# EAGLE board Linovo_EU_2Gang_1way (EAGLE 7.4.0)
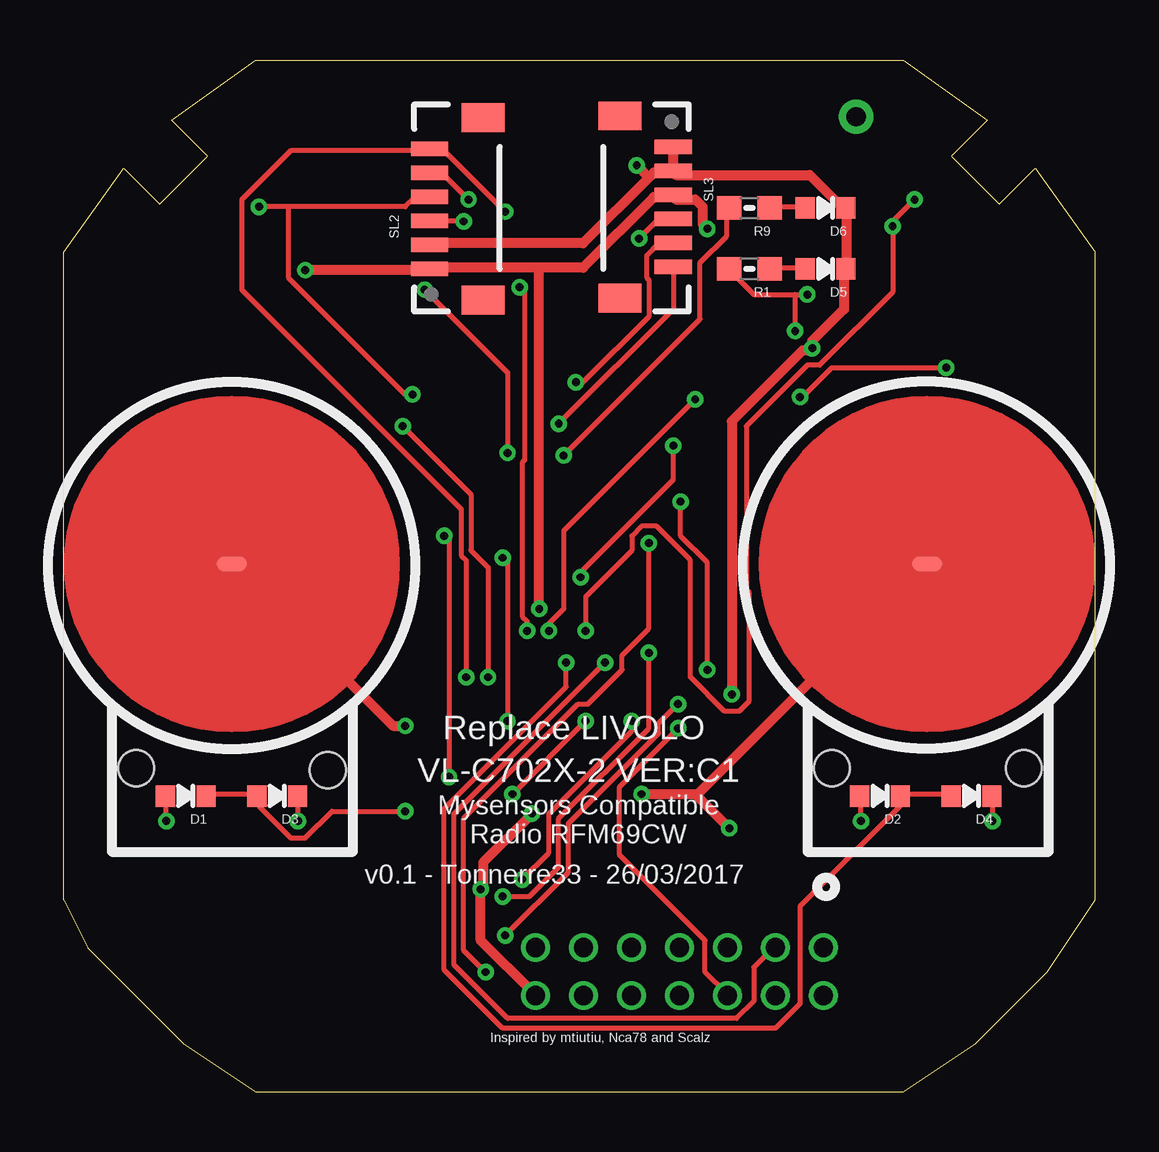
[diagram p0: board, top side]
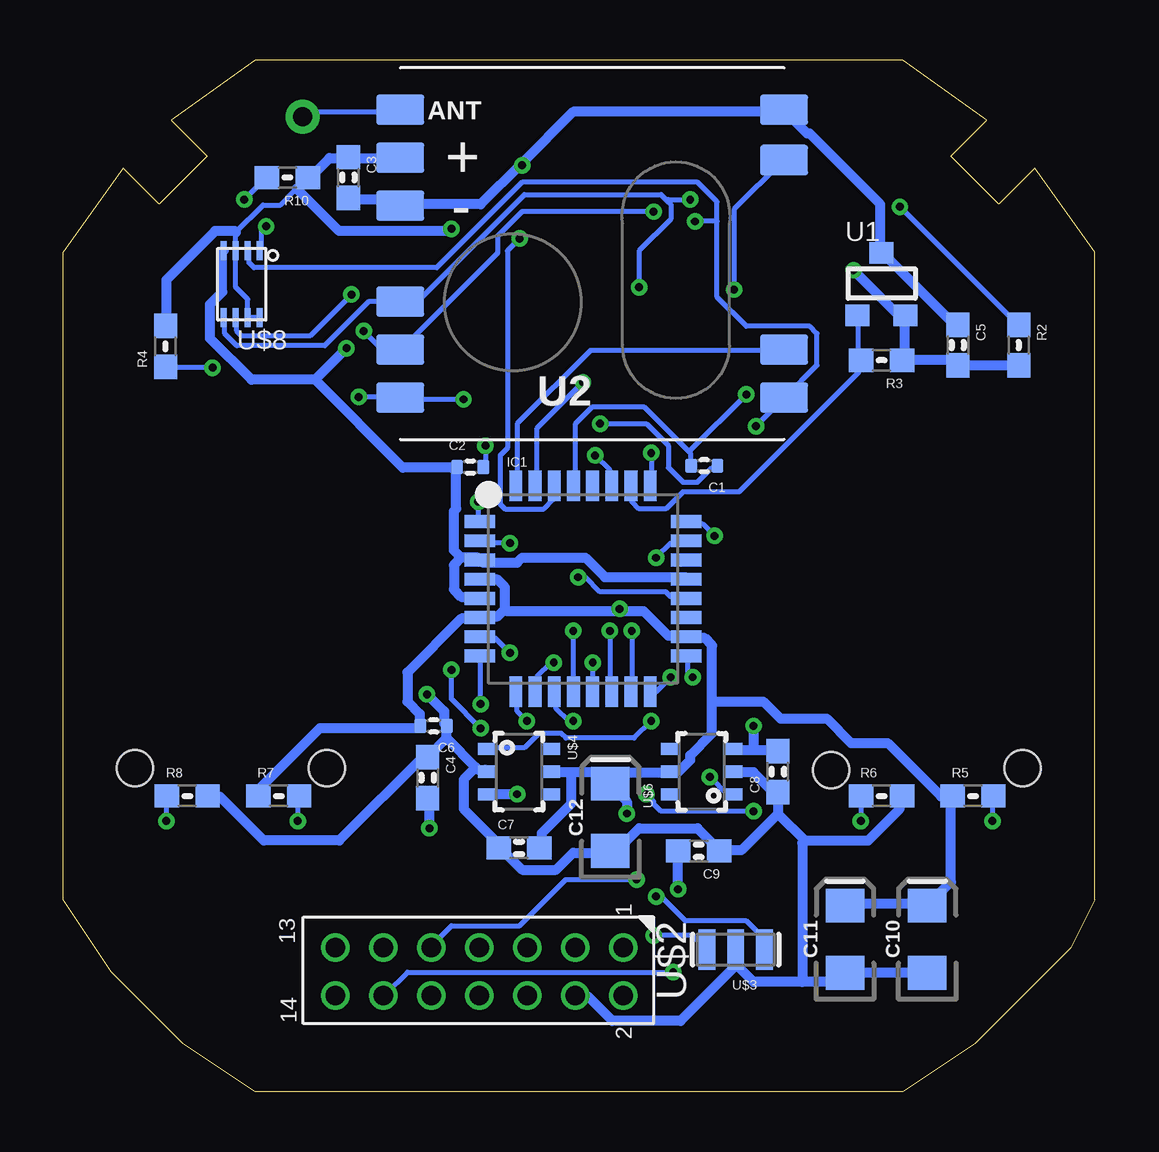
[diagram p1: board, bottom side, seen from below]

Size 43 x 43 mm. Coordinates in mm from the lower left corner, seen from the top.
Outline: 0,8 0,35 2.5,38.5 4,37 6,39 4.5,40.5 8,43 35,43 38.5,40.5 37,39 39,37 40.5,38.5 43,35 43,8 41,5 38,2 35,0 8,0 5,2 1,6 0,8
Copper layers (1*16): Top 0.0356mm / dielectric 1.5011mm / Bottom 0.0356mm
Design rules "PCBs_io-8mil-jby *": minimum track width 8mil, minimum drill 13mil, track to track 8mil, track to pad 8mil, pad to pad 8mil, via to via 8mil, smd to smd 8mil, copper to edge 15mil, drill to drill 8mil, minimum pad ring 7mil, minimum via ring 7mil, stop-mask expansion 3mil, vias tented up to drill 20mil, thermal gap 10mil
Net classes: 1 POWER: width 0.406 mm; 2 PAD: width 0.406 mm, clearance 0.406 mm
Holes 1.5 mm at 3.01,13.49 11,13.4 32.01,13.49 40.01,13.49
bRestrict: area -0.1,14.8 to 14.3,29.3; area 28.6,14.7 to 43.1,29.2

## Footprints (pad centres in the part's own frame; a part is rotated, then mirrored left to right if it is on the bottom)
0402-CAP = smd 0.5 x 0.6: 1 -0.55,0; 2 0.55,0
0603-CAP = smd 1.016 x 0.965: 1 -0.85,0; 2 0.85,0
EIA3216 = smd 1.4 x 1.6: + 1.4,0; - -1.4,0
0603-LED = smd 0.8 x 0.9: MINUS -0.85,0; PLUS 0.85,0
TQFP32-08 = smd 1.27 x 0.533: 1 -4.293,2.8; 2 -4.293,2; 3 -4.293,1.2; 4 -4.293,0.4; 5 -4.293,-0.4; 6 -4.293,-1.2; 7 -4.293,-2; 8 -4.293,-2.8; 17 4.293,-2.8; 18 4.293,-2; 19 4.293,-1.2; 20 4.293,-0.4; 21 4.293,0.4; 22 4.293,1.2; 23 4.293,2; 24 4.293,2.8 | smd 0.533 x 1.27: 9 -2.8,-4.293; 10 -2,-4.293; 11 -1.2,-4.293; 12 -0.4,-4.293; 13 0.4,-4.293; 14 1.2,-4.293; 15 2,-4.293; 16 2.8,-4.293; 25 2.8,4.293; 26 2,4.293; 27 1.2,4.293; 28 0.4,4.293; 29 -0.4,4.293; 30 -1.2,4.293; 31 -2,4.293; 32 -2.8,4.293
0603-RES = smd 1.016 x 0.965: 1 -0.85,0; 2 0.85,0
1X06-1MM = smd 0.6 x 1.55: 1 -2.54,1.27; 2 -1.54,1.27; 3 -0.54,1.27; 4 0.46,1.27; 5 1.46,1.27; 6 2.46,1.27 | smd 1.2 x 1.8: P$1 -3.84,-0.955; P$2 3.76,-0.955
SOT23-3 = smd 1 x 0.9: 1 -1,-1.3; 2 1,-1.3; 3 0,1.3
RFM69CW_MINIMAL = smd 2 x 1.27: ANT 8,-6; DIO0 -8,4; GND 8,-2; GND2 -8.002,-6; MISO -8,6; MOSI 8,2; NSS 8,6; RESET -8.002,-3.905; SCK 8,4; VDD 8,-4
SENSING_PAD_ROUND = smd 1.27 x 0.635: SENSEPAD 0,0
CONNECTOR_02_X_07_2MM = drill 0.8: 1 1.27,-1.27; 2 3.27,-1.27; 3 1.27,-3.27; 4 3.27,-3.27; 5 1.27,-5.27; 6 3.27,-5.27; 7 1.27,-7.27; 8 3.27,-7.27; 9 1.27,-9.27; 10 3.27,-9.27; 11 1.27,-11.27; 12 3.27,-11.27; 13 1.27,-13.27; 14 3.27,-13.27
RESONATOR-SMD = smd 0.7 x 1.7: 1 -1.2,0; 2 0,0; 3 1.2,0
SOT-23-6 = smd 0.51 x 0.8: 1 0.955,-0.03; 2 1.905,-0.03; 3 2.855,-0.03; 4 2.855,2.57; 5 1.905,2.57; 6 0.955,2.57
RFM12B-ANTENNA = drill 0.8 pad 1.422: P$1 0,0
AT25DF512C_MAHNT = smd 0.25 x 0.8: CS -0.75,-1.4; GND 0.75,-1.4; HOLD -0.25,1.4; MISO -0.25,-1.4; MOSI 0.75,1.4; SCK 0.25,1.4; VCC -0.75,1.4; WP 0.25,-1.4

## Placement (x,y rotation side)
C1  100n  [0402-CAP]  16.28,26.09 180 bottom
C2  100n  [0402-CAP]  26.04,26.04 0 bottom
C3  10u  [0603-CAP]  31.11,38.1 270 bottom
C4  0-50pF  [0603-CAP]  27.81,13.08 270 bottom
C5  100n  [0603-CAP]  5.71,31.11 270 bottom
C6  100n  [0402-CAP]  27.56,15.24 180 bottom
C7  100n  [0603-CAP]  24,10.16 0 bottom
C8  0-50pF  [0603-CAP]  13.21,13.34 90 bottom
C9  100n  [0603-CAP]  16.51,10.03 180 bottom
C10  10u  [EIA3216]  6.99,6.35 90 bottom
C11  100u  [EIA3216]  10.41,6.35 90 bottom
C12  4.7u  [EIA3216]  20.19,11.43 90 bottom
D1  LED0603  [0603-LED]  5.08,12.32 180 top
D2  LED0603  [0603-LED]  34.02,12.32 180 top
D3  LED0603  [0603-LED]  8.89,12.32 180 top
D4  LED0603  [0603-LED]  37.83,12.32 180 top
D5  LED0603  [0603-LED]  31.75,34.29 180 top
D6  LED0603  [0603-LED]  31.75,36.83 180 top
IC1  ATMEGA328P  [TQFP32-08]  21.34,20.95 0 bottom
R1  1k5  [0603-RES]  28.57,34.29 180 top
R2  10k  [0603-RES]  3.17,31.11 270 bottom
R3  10k  [0603-RES]  8.89,30.48 180 bottom
R4  56k  [0603-RES]  38.73,31.06 90 bottom
R5  [0603-RES]  5.08,12.32 0 bottom
R6  [0603-RES]  8.89,12.32 0 bottom
R7  [0603-RES]  34.02,12.32 0 bottom
R8  [0603-RES]  37.83,12.32 0 bottom
R9  1k5  [0603-RES]  28.57,36.83 180 top
R10  56k  [0603-RES]  33.66,38.1 180 bottom
SL2  [1X06-1MM]  16.51,36.83 90 top
SL3  [1X06-1MM]  24.13,36.83 270 top
U1  ATSHA204A  [SOT23-3]  8.89,33.66 0 bottom
U2  RFM69_MINIMAL  [RFM69CW_MINIMAL]  20.95,34.92 180 bottom
U$1  SENSOR_PAD_ROUND  [SENSING_PAD_ROUND]  35.98,21.99 0 top
U$2  CONNECTOR_02_X_072MM_SPACING  [CONNECTOR_02_X_07_2MM]  18.39,7.27 270 bottom
U$3  8MHZ  [RESONATOR-SMD]  14.97,5.91 180 bottom
U$4  TTP223-BA6  [SOT-23-6]  25.27,15.24 270 bottom
U$5  SENSOR_PAD_ROUND  [SENSING_PAD_ROUND]  7,21.99 0 top
U$6  TTP223-BA6  [SOT-23-6]  15.11,11.43 90 bottom
U$7  RFM12B_ANTENNA  [RFM12B-ANTENNA]  33.02,40.64 0 bottom
U$8  AT25DF512C_MAHNT  [AT25DF512C_MAHNT]  35.56,33.66 180 bottom

## Library data of the parts
C1-C9 D1-D6 IC1 R1-R10 U$7 = LowPowerLab
C10-C12 = SparkFun-Capacitors; PROD_ID: CAP-00811
SL2 SL3 = SparkFun-Connectors
U1 = TD-MySensors
U2 U$8 = Multisensors_lib
U$1 U$2 U$4-U$6 = NCA_Sensors
U$3 = SparkFun

## Nets
A2: IC1.25 U2.RESET
A3_ATSHA: IC1.26 R3.2 U1.1
CSN: IC1.14 R4.1 U2.NSS
D0_RX: IC1.30 SL3.4
D1_TX: IC1.31 SL3.5
DTR: C1.1 SL3.6
FLASH_CS: IC1.12 R10.2 U$8.CS
GND [POWER]: C2.1 C3.2 C4.1 C5.1 C6.1 C7.1 C8.1 C9.1 C10.- C11.- C12.- D5.MINUS D6.MINUS IC1.3 IC1.5 IC1.21 R6.2 R8.2 SL2.2 SL3.1 SL3.2 U1.3 U2.GND U2.GND2 U$2.4 U$3.2 U$4.2 U$6.2 U$8.GND
IRQ: IC1.32 U2.DIO0
L1_RST: IC1.2 U$2.12
L1_SET: IC1.1 U$2.10
L2_RST: IC1.9 U$2.9
L2_SET: IC1.10 U$2.11
LED1: D1.MINUS D3.PLUS IC1.11
LED2: D2.MINUS D4.PLUS IC1.13
MISO: IC1.16 SL2.3 U2.MISO U$8.MISO
MOSI: IC1.15 SL2.5 U2.MOSI U$8.MOSI
N$1: D5.PLUS R1.1
N$2: IC1.7 U$3.1
N$3 [PAD]: C4.2 U$1.SENSEPAD U$4.3
N$4: C2.2 IC1.20
N$5: D1.PLUS R5.2
N$6: D3.MINUS R6.1
N$7: D2.PLUS R7.2
N$8: IC1.8 U$3.3
N$9 [PAD]: C8.2 U$5.SENSEPAD U$6.3
N$10: D4.MINUS R8.1
N$11: D6.PLUS R9.1
N$12: IC1.27 R9.2
N$14: U2.ANT U$7.P$1
RST: C1.2 IC1.29 R2.1 SL2.4
SCK: IC1.17 R1.2 SL2.6 U2.SCK U$8.SCK
TOUCH_1: IC1.23 U$4.1
TOUCH_2: IC1.24 U$6.1
VCC [POWER]: C3.1 C5.2 C6.2 C7.2 C9.2 C10.+ C11.+ C12.+ IC1.4 IC1.6 IC1.18 R2.2 R3.1 R4.2 R5.1 R7.1 R10.1 SL2.1 SL3.3 U1.2 U2.VDD U$2.2 U$4.5 U$6.5 U$8.HOLD U$8.VCC U$8.WP

## Tracks (layer width: path | path; a pad name or v marks a point on that pad's centre or on a via)
A2  (via drill 0.33)
  Top 0.203: v18.49,26.62 18.49,29.97 v15.04,33.43
  Bottom 0.203: v18.49,26.62 18.49,25.3 IC1.25 | v15.04,33.43 15.04,36.78 13.01,38.81 U2.RESET
A3_ATSHA
  Bottom 0.203: U1.1 9.86,32.31 9.86,30.58 9.75,30.48 R3.2 9.86,30.48 9.86,29.97 14.83,24.99 17.17,24.99 17.88,24.28 19,24.28 19.3,24.59 19.3,25.2 IC1.26
CSN  (via drill 0.33)
  Top 0.203: v36.78,30.18 32,30.18 30.79,28.96 v30.68,28.96 | v20.22,19.2 20.22,19.51 20.83,20.12 20.83,23.37 v26.31,28.85
  Bottom 0.203: v36.78,30.18 38.71,30.18 R4.1 | v30.68,28.96 28.96,28.96 U2.NSS 28.85,28.85 v26.31,28.85 | v20.22,19.2 20.22,16.66 IC1.14
D0_RX  (via drill 0.33)
  Top 0.203: v23.98,35.56 24.69,36.27 25.4,36.27 SL3.4
  Bottom 0.203: v23.98,35.56 24.49,35.05 24.49,26.82 24.79,26.52 24.79,24.49 24.59,24.28 22.96,24.28 22.55,24.69 22.55,25.2 IC1.30
D1_TX  (via drill 0.33)
  Top 0.203: v21.34,29.57 21.64,29.57 24.38,32.31 24.38,33.83 24.28,33.93 24.28,34.85 24.79,35.36 25.4,35.36 SL3.5
  Bottom 0.203: v21.34,29.57 23.27,27.64 23.27,25.3 IC1.31
DTR  (via drill 0.33)
  Top 0.203: v20.62,27.84 25.4,32.61 SL3.6
  Bottom 0.203: v20.62,27.84 18.69,27.84 17.78,26.92 17.78,26.01 17.17,25.4 16.56,25.4 15.95,26.01 15.75,26.01 C1.1
FLASH_CS  (via drill 0.33)
  Top 0.203: v35.46,37.19 34.54,36.27 v34.54,36.07 34.54,33.33 31.5,30.28 30.99,30.28 28.45,27.74 28.45,20.93 28.55,20.83 28.55,16.26 28.14,15.85 27.53,15.85 26.11,17.27 26.11,22.15 24.69,23.57 24.08,23.57 23.67,23.16 23.67,22.55 21.74,20.62 v21.74,19.2
  Bottom 0.203: v34.54,36.07 34.75,35.87 34.75,35.15 U$8.CS | v35.46,37.19 34.54,38.1 R10.2 | v21.74,19.2 IC1.12
GND  (via drill 0.33)
  Top 0.406: 24.38,38.1 24.59,38.3 25.4,38.3 SL3.2 | 24.38,38.1 21.64,35.36 15.24,35.36 SL2.2 | SL3.2 SL3.1 | SL3.2 25.5,38.2 31.09,38.2 32.41,36.88 D6.MINUS 32.61,36.78 32.61,34.34 D5.MINUS 32.51,34.14 32.51,32.61 31.19,31.29 v31.19,30.99 31.09,30.89 30.79,30.89 27.84,27.94 v27.84,16.56 | v23.88,38.61 24.38,38.1
  Bottom 0.406: C10.- 7.01,4.98 10.36,4.98 C11.- 10.57,4.88 10.87,4.57 12.19,4.57 | 12.19,4.57 14.22,4.57 14.94,5.28 14.94,5.89 U$3.2 15.04,5.18 17.27,2.95 20.12,2.95 21.13,3.96 21.64,3.96 U$2.4 | U$6.2 15.04,13.31 14.22,13.31 13.41,12.5 C8.1 13.21,11.58 | 13.21,11.58 14.73,10.06 15.65,10.06 C9.1 15.75,10.16 16.56,10.97 19,10.97 20.02,9.96 C12.- 20.22,9.96 21.74,9.96 22.45,9.25 23.88,9.25 24.69,10.06 C7.1 24.89,10.16 24.89,10.36 26.31,11.79 26.31,13.01 25.81,13.51 | 12.09,10.46 9.45,10.46 8.13,11.79 8.13,12.29 R6.2 | 13.21,11.58 12.09,10.46 | 27.03,14.73 27.03,15.24 C6.1 27.13,15.34 27.13,15.85 v27.84,16.56 | 27.03,14.73 27.74,14.02 C4.1 27.94,14.02 31.5,10.46 34.65,10.46 36.47,12.29 36.88,12.29 R8.2 | 27.03,14.73 25.81,13.51 | 25.81,13.51 25.7,13.41 25.4,13.41 U$4.2 | 12.19,4.57 12.19,10.36 12.09,10.46 | 26.42,22.25 26.72,22.55 26.72,24.18 26.62,24.28 26.62,26.01 C2.1 26.82,26.01 28.85,26.01 32.51,29.67 | 26.42,22.25 25.7,22.25 IC1.3 25.5,22.05 24.08,22.05 23.88,22.25 21.23,22.25 20.42,21.44 17.07,21.44 IC1.21 | 32.51,29.67 35.15,29.67 36.88,31.39 36.88,32.82 36.37,33.33 36.37,35.05 U$8.GND | 26.42,22.25 26.72,21.95 26.72,20.93 26.42,20.62 25.7,20.62 IC1.5 | C3.2 31.09,37.19 29.16,37.19 28.96,36.98 U2.GND 28.75,36.98 25.6,36.98 23.93,38.66 | C5.1 5.79,31.9 8.84,34.95 U1.3 8.94,35.15 8.94,36.98 11.89,39.93 11.99,39.93 12.9,40.84 U2.GND2 13.11,40.84 21.74,40.84 23.93,38.66 | v23.88,38.61 23.93,38.66 | v31.19,30.99 32.51,29.67
IRQ
  Bottom 0.203: IC1.32 24.08,25.3 24.08,27.84 21.03,30.89 13.01,30.89 U2.DIO0
L1_RST  (via drill 0.33)
  Top 0.203: v24.38,22.86 24.38,19.3 23.27,18.19 23.27,17.58 21.84,16.15 21.44,16.15 16.66,11.38 16.66,5.89 v17.58,4.98
  Bottom 0.203: v24.38,22.86 25.6,22.86 IC1.2 | v17.58,4.98 28.65,4.98 29.57,4.06 U$2.12
L1_SET  (via drill 0.33)
  Top 0.203: v25.7,24.59 25.7,23.16 26.82,22.05 v26.82,17.58 | v25.6,15.14 23.16,12.7 23.16,9.86 26.72,6.3 26.72,4.98 27.64,4.06 U$2.10
  Bottom 0.203: v25.7,24.59 25.7,23.77 IC1.1 | v26.82,17.58 26.82,16.36 v25.6,15.14
L2_RST  (via drill 0.33)
  Top 0.203: v23.67,15.44 23.67,15.04 20.22,11.58 20.22,9.96 v19.1,8.84
  Bottom 0.203: v23.67,15.44 24.08,15.85 24.08,16.66 IC1.9 | v19.1,8.84 22.05,8.84 23.98,6.91 26.82,6.91 27.64,6.1 U$2.9
L2_SET  (via drill 0.33)
  Top 0.203: v22.55,17.88 16.26,11.58 16.26,5.28 18.49,3.05 28.04,3.05 28.75,3.76 28.75,5.18 29.57,5.99 U$2.11
  Bottom 0.203: v22.55,17.88 22.66,17.88 23.27,17.27 23.27,16.66 IC1.10
LED1  (via drill 0.33)
  Top 0.203: D1.MINUS 5.99,12.39 8.03,12.39 D3.PLUS 8.13,12.29 8.13,11.89 9.45,10.57 10.06,10.57 11.18,11.68 v14.22,11.68 | v18.69,12.39 v21.74,15.44
  Bottom 0.203: v21.74,15.44 21.95,15.44 22.45,15.95 22.45,16.66 IC1.11 | v18.69,12.39 18.39,12.09 18.39,11.99 18.09,11.68 v14.22,11.68
LED2  (via drill 0.33)
  Top 0.203: D4.PLUS 36.88,12.39 34.95,12.39 D2.MINUS 34.85,12.29 34.85,11.89 30.68,7.72 30.68,3.66 29.67,2.64 18.29,2.64 15.85,5.08 15.85,11.79 20.93,16.87 v20.93,17.88
  Bottom 0.203: v20.93,17.88 IC1.13
MISO  (via drill 0.33)
  Top 0.203: v17.68,17.27 17.68,21.84 16.97,22.55 16.97,24.89 v14.12,27.74 | v16.66,36.27 15.24,36.27 SL2.3
  Bottom 0.203: 15.75,36.27 15.75,33.12 14.53,31.9 11.89,31.9 11.58,31.6 11.58,30.28 12.9,28.96 U2.MISO 13.01,28.85 v14.12,27.74 | 15.75,36.27 15.75,37.08 16.56,37.9 23.88,37.9 27.43,34.34 35.05,34.34 35.26,34.54 35.26,35.05 U$8.MISO | IC1.16 18.29,16.66 v17.68,17.27 | 15.75,36.27 v16.66,36.27
MOSI  (via drill 0.33)
  Top 0.203: v19.3,19.2 19.3,19.61 19.1,19.81 19.1,26.21 19.2,26.31 19.2,33.33 v19,33.53 | v16.87,37.19 15.85,38.2 15.24,38.2 SL2.5
  Bottom 0.203: U$8.MOSI 36.27,32.21 36.27,31.6 35.76,31.09 32.11,31.09 30.28,32.92 U2.MOSI 28.85,33.02 28.14,33.02 23.77,37.39 18.09,37.39 17.83,37.13 | v19.3,19.2 19.3,16.66 IC1.15 | v19,33.53 19,35.05 17.68,36.37 17.68,36.98 17.83,37.13 | v16.87,37.19 17.78,37.19 17.83,37.13
N$1
  Top 0.203: D5.PLUS 30.89,34.34 29.46,34.34 R1.1
N$2  (via drill 0.33)
  Top 0.203: v24.38,18.29 24.38,15.14 20.62,11.38 20.62,9.35 19.41,8.13 v18.29,8.13
  Bottom 0.203: v24.38,18.29 24.99,18.9 25.6,18.9 IC1.7 | v18.29,8.13 18.09,8.13 17.07,7.11 14.53,7.11 13.82,6.4 13.82,5.99 U$3.1
N$3  (via drill 0.33)
  Top 0.406: 26.42,12.39 v24.08,12.39 | 26.42,12.39 35.97,21.95 U$1.SENSEPAD | v27.74,10.97 26.42,12.29 26.42,12.39
  Bottom 0.406: v24.08,12.39 25.3,12.39 U$4.3 | v27.74,10.97 27.74,12.19 C4.2
N$4  (via drill 0.33)
  Top 0.203: v25.4,26.92 25.4,25.5 21.54,21.64 v21.54,21.44
  Bottom 0.203: v25.4,26.92 25.4,26.11 C2.2 | v21.54,21.44 21.23,21.44 20.62,20.83 17.88,20.83 17.68,20.62 17.07,20.62 IC1.20
N$5  (via drill 0.33)
  Top 0.203: v4.27,11.28 4.27,12.29 D1.PLUS
  Bottom 0.203: v4.27,11.28 4.27,12.29 D1.PLUS
N$6  (via drill 0.33)
  Top 0.203: v9.75,11.28 9.75,12.29 R6.1
  Bottom 0.203: v9.75,11.28 9.75,12.29 R6.1
N$7  (via drill 0.33)
  Top 0.203: v33.22,11.28 33.22,12.29 D2.PLUS
  Bottom 0.203: v33.22,11.28 33.22,12.29 D2.PLUS
N$8  (via drill 0.33)
  Top 0.203: v25.6,16.15 24.79,15.34 24.79,14.94 21.03,11.18 21.03,9.14 v18.39,6.5
  Bottom 0.203: v25.6,16.15 25.6,18.09 IC1.8 | v18.39,6.5 16.76,6.5 16.26,5.99 U$3.3
N$9  (via drill 0.33)
  Top 0.406: v14.22,15.24 13.72,15.24 7.01,21.95 U$5.SENSEPAD
  Bottom 0.406: 14.22,14.22 13.21,14.22 C8.2 | 14.22,14.22 15.04,14.22 U$6.3 | v14.22,15.24 14.22,14.22
N$10  (via drill 0.33)
  Top 0.203: v38.71,11.28 38.71,12.29 R8.1
  Bottom 0.203: v38.71,11.28 38.71,12.29 R8.1
N$11
  Top 0.203: D6.PLUS 30.89,36.88 29.46,36.88 R9.1
N$12  (via drill 0.33)
  Top 0.203: v20.83,26.52 26.52,32.21 26.52,34.54 27.64,35.66 27.64,36.78 R9.2
  Bottom 0.203: v20.83,26.52 20.22,25.91 20.22,25.3 IC1.27
N$14
  Bottom 0.203: U$7.P$1 32.82,40.84 28.96,40.84 U2.ANT
RST  (via drill 0.33)
  Top 0.203: 9.35,36.88 14.22,36.88 14.63,37.29 SL2.4 | 9.35,36.88 v8.13,36.88 | v14.53,29.06 14.22,29.06 9.35,33.93 9.35,36.88
  Bottom 0.203: 16.92,26.67 18.8,28.55 20.93,28.55 21.64,27.84 21.64,25.3 IC1.29 | 16.92,26.67 16.87,26.62 16.87,26.11 C1.2 | v8.13,36.88 3.25,32 R2.1 | v14.53,29.06 16.92,26.67
SCK  (via drill 0.33)
  Top 0.203: 30.48,33.22 28.75,33.22 27.74,34.24 R1.2 | 30.48,33.22 v30.99,33.22 | 30.48,33.22 v30.48,31.7 | v16.76,17.27 16.76,22.15 16.56,22.35 16.56,24.28 7.42,33.43 7.42,37.19 9.45,39.22 15.24,39.22 | v18.39,36.68 15.85,39.22 15.24,39.22 | 15.24,39.22 SL2.6
  Bottom 0.203: v30.99,33.22 32.72,31.5 35.56,31.5 35.76,31.7 35.76,32.21 U$8.SCK | v30.48,31.7 29.77,30.99 28.96,30.99 U2.SCK 28.85,30.99 24.89,34.95 24.89,35.66 23.88,36.68 v18.39,36.68 | v16.76,17.27 16.97,17.48 16.97,18.09 IC1.17
TOUCH_1  (via drill 0.33)
  Top 0.203: v18.49,15.44 18.49,22.05 v18.29,22.25
  Bottom 0.203: v18.49,15.44 19.2,14.73 22.05,14.73 22.25,14.94 23.16,14.94 23.77,14.33 25.3,14.33 U$4.1 | v18.29,22.25 17.68,22.86 17.07,22.86 IC1.23
TOUCH_2  (via drill 0.33)
  Top 0.203: v16.05,13.11 16.05,22.96 v15.85,23.16
  Bottom 0.203: v16.05,13.11 15.34,12.39 15.14,12.39 U$6.1 | v15.85,23.16 16.36,23.67 16.97,23.67 IC1.24
VCC  (via drill 0.33)
  Top 0.406: 19.81,34.34 21.64,34.34 24.59,37.29 25.4,37.29 SL3.3 25.5,37.19 26.31,37.19 26.62,36.88 26.62,36.17 v26.82,35.97 | 19.81,34.34 15.24,34.34 SL2.1 15.14,34.24 v10.06,34.24 | U$2.2 19.61,4.06 17.37,6.3 v17.37,8.43 17.48,8.53 17.48,9.55 v19.51,11.58 | v19.81,20.12 19.81,34.34
  Bottom 0.203: U$8.VCC U$8.HOLD 35.31,33.02 35.81,33.53 U$8.WP 35.81,35.81 34.67,36.96 33.95,36.96 33.27,37.64 R10.1
  Bottom 0.406: R4.2 38.71,32 38.71,33.83 36.68,35.87 35.87,35.87 35.81,35.81 | R10.1 32.72,38.1 31.9,38.91 31.19,38.91 C3.1 30.99,38.91 U2.VDD | R2.2 3.25,30.28 5.69,30.28 C5.2 5.89,30.28 6.1,30.48 R3.1 8.03,30.48 7.92,30.58 7.92,32.31 U1.2 8.13,32.31 v10.06,34.24 | 33.27,37.64 31.5,35.87 26.92,35.87 v26.82,35.97 | R7.1 34.85,12.39 34.85,12.6 32.31,15.14 28.25,15.14 C6.2 28.14,15.24 28.14,15.75 28.65,16.26 28.65,17.48 26.42,19.71 25.7,19.71 IC1.6 25.5,19.81 24.89,19.81 24.59,20.12 | 24.59,20.12 24.59,21.03 24.89,21.34 25.6,21.34 IC1.4 | v17.37,8.43 17.37,9.96 C9.2 | C11.+ 10.36,7.82 7.11,7.82 C10.+ 6.91,7.82 5.99,8.74 5.99,12.29 R5.1 6.2,12.29 6.4,12.29 8.64,14.53 10.16,14.53 11.18,15.54 13.11,15.54 13.82,16.26 15.95,16.26 | C12.+ 20.12,12.9 19.71,13.31 17.78,13.31 U$6.5 17.48,13.31 17.37,13.31 16.87,13.82 16.87,14.02 15.95,14.94 15.95,16.26 | 21.84,13.31 20.73,13.31 20.32,12.9 C12.+ | 21.84,13.31 22.66,13.31 U$4.5 | 21.84,13.31 21.84,11.99 23.06,10.77 23.06,10.16 C7.2 | 15.95,16.26 15.95,18.59 16.26,18.9 16.97,18.9 IC1.18 17.17,19 17.78,19 18.8,20.02 19.81,20.02 | v19.51,11.58 19.51,12.09 20.12,12.7 C12.+ | 19.81,20.02 24.49,20.02 24.59,20.12 | v19.81,20.12 19.81,20.02

## Text on the board
tPlace: Replace LIVOLO | VL-C702X-2 VER:C1 | Mysensors Compatible / Radio RFM69CW | v0.1 - Tonnerre33 - 26/03/2017 | Inspired by mtiutiu, Nca78 and Scalz